# Altium PCB Handheld_REV1.PcbDoc (part 1 of 2)
Units mm, origin at the board's own origin, x right, y up, seen from the top; angles counter-clockwise.
Board outline 85 x 55 mm, 4 copper layers (Top Layer, Mid-Layer 1, Mid-Layer 2, Bottom Layer); 260 components, 237 nets, 1189 pads, 85 vias.
Unrouted connection lines stored in the file: 656.
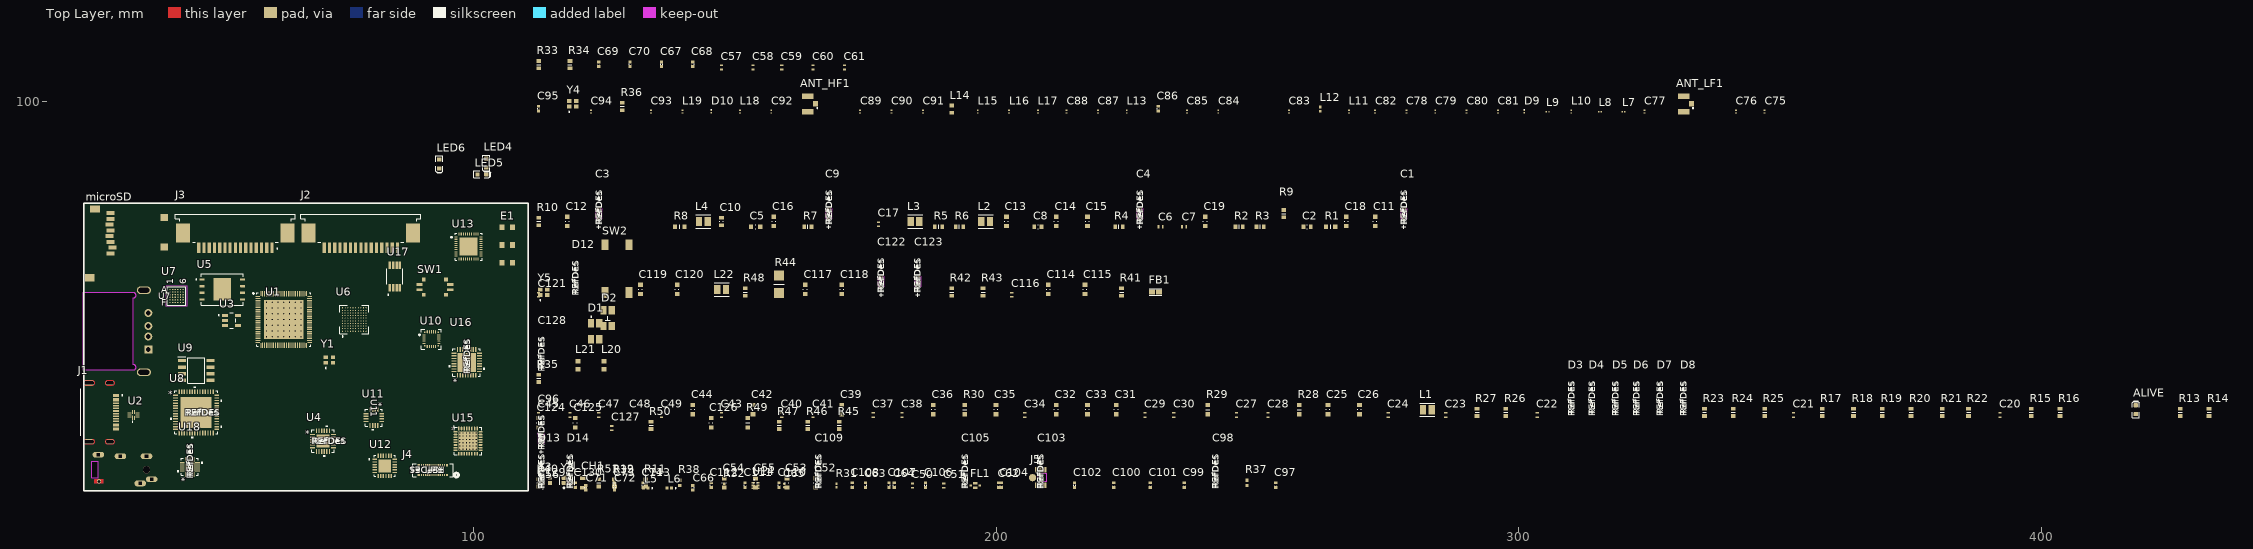
[diagram p0: Top Layer view]
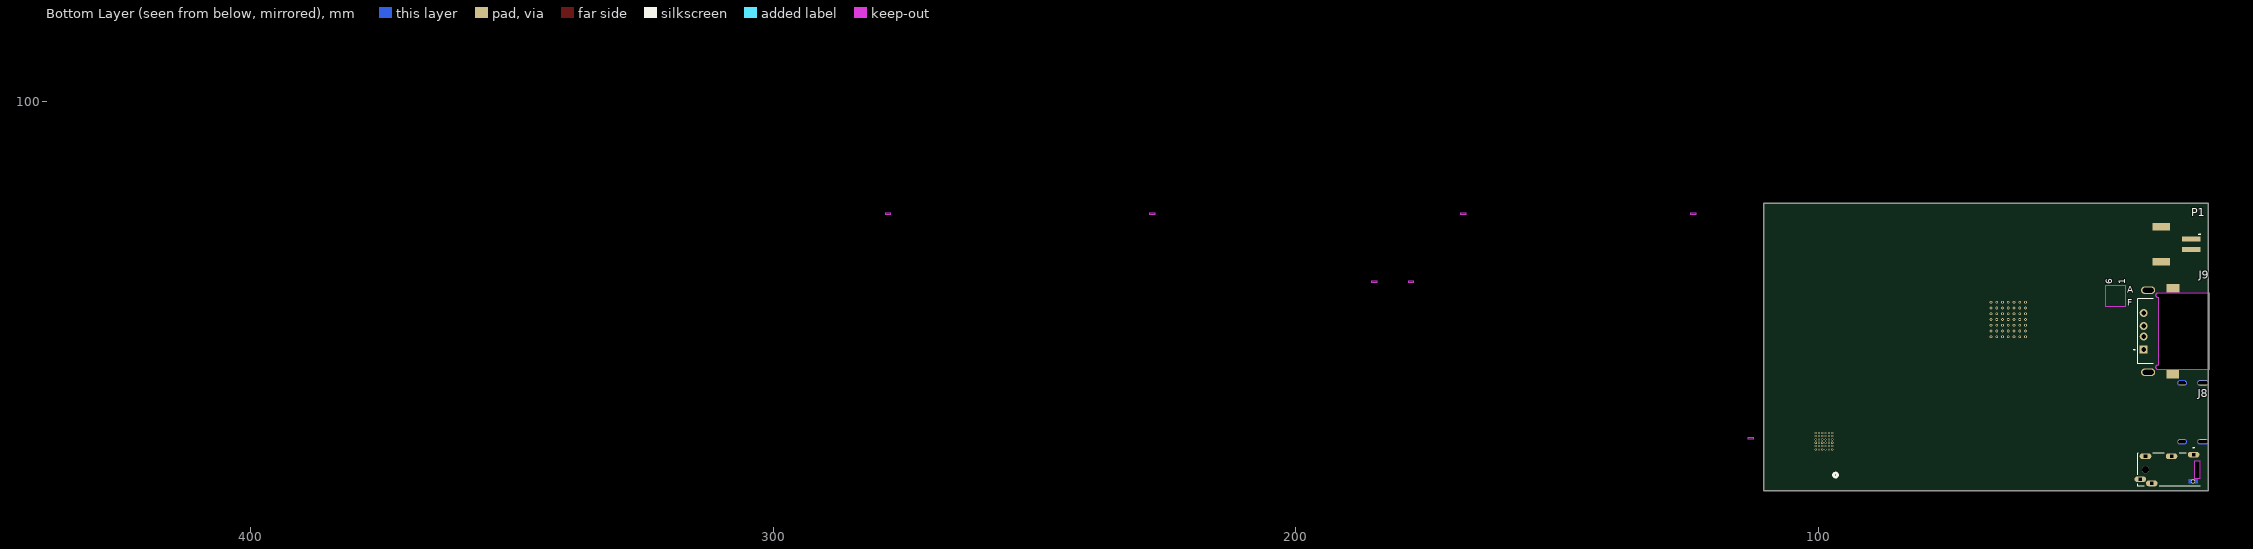
[diagram p1: Bottom Layer view, seen from below]
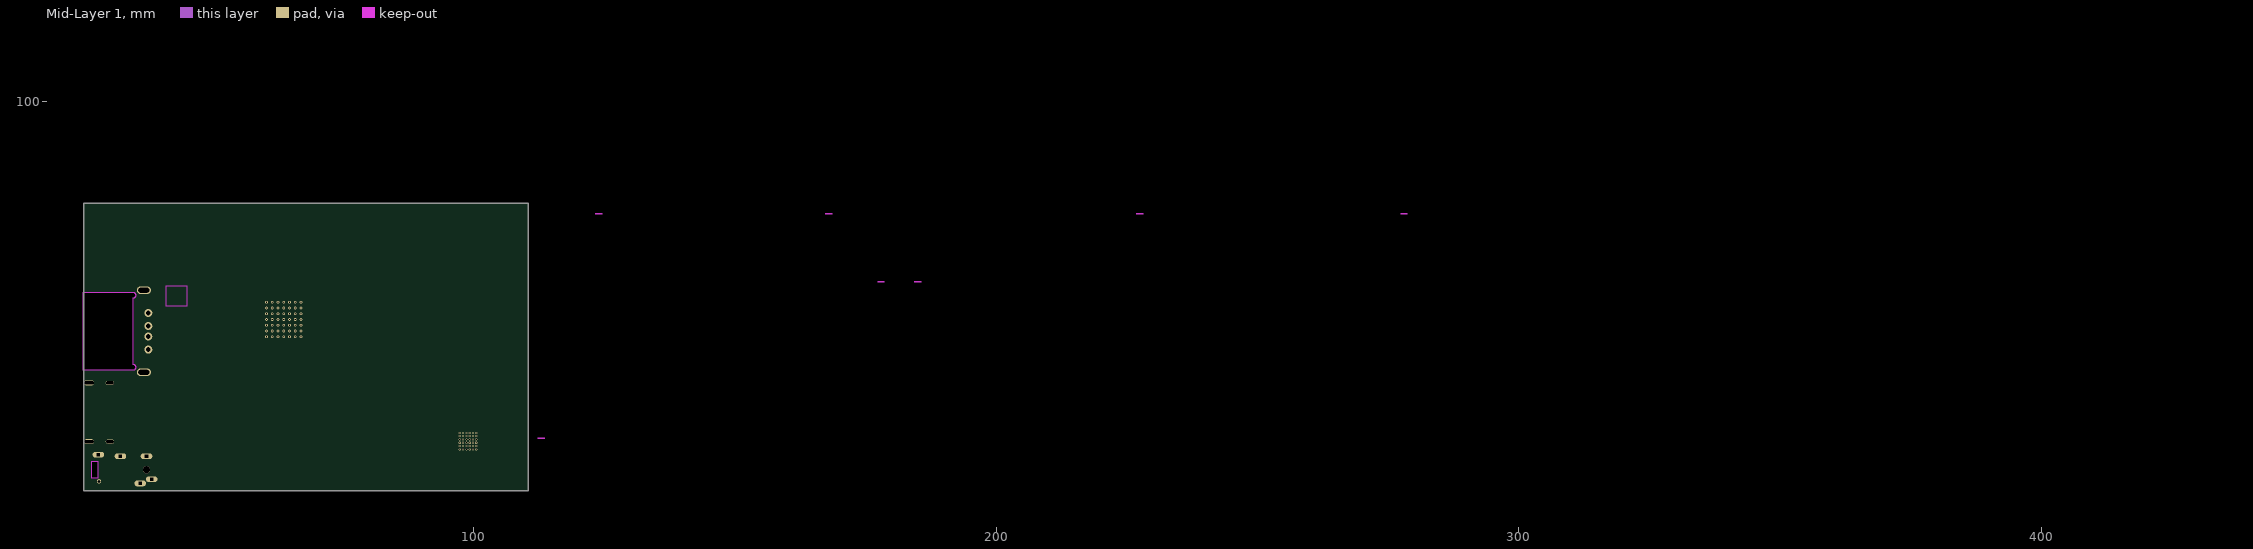
[diagram p2: Mid-Layer 1]
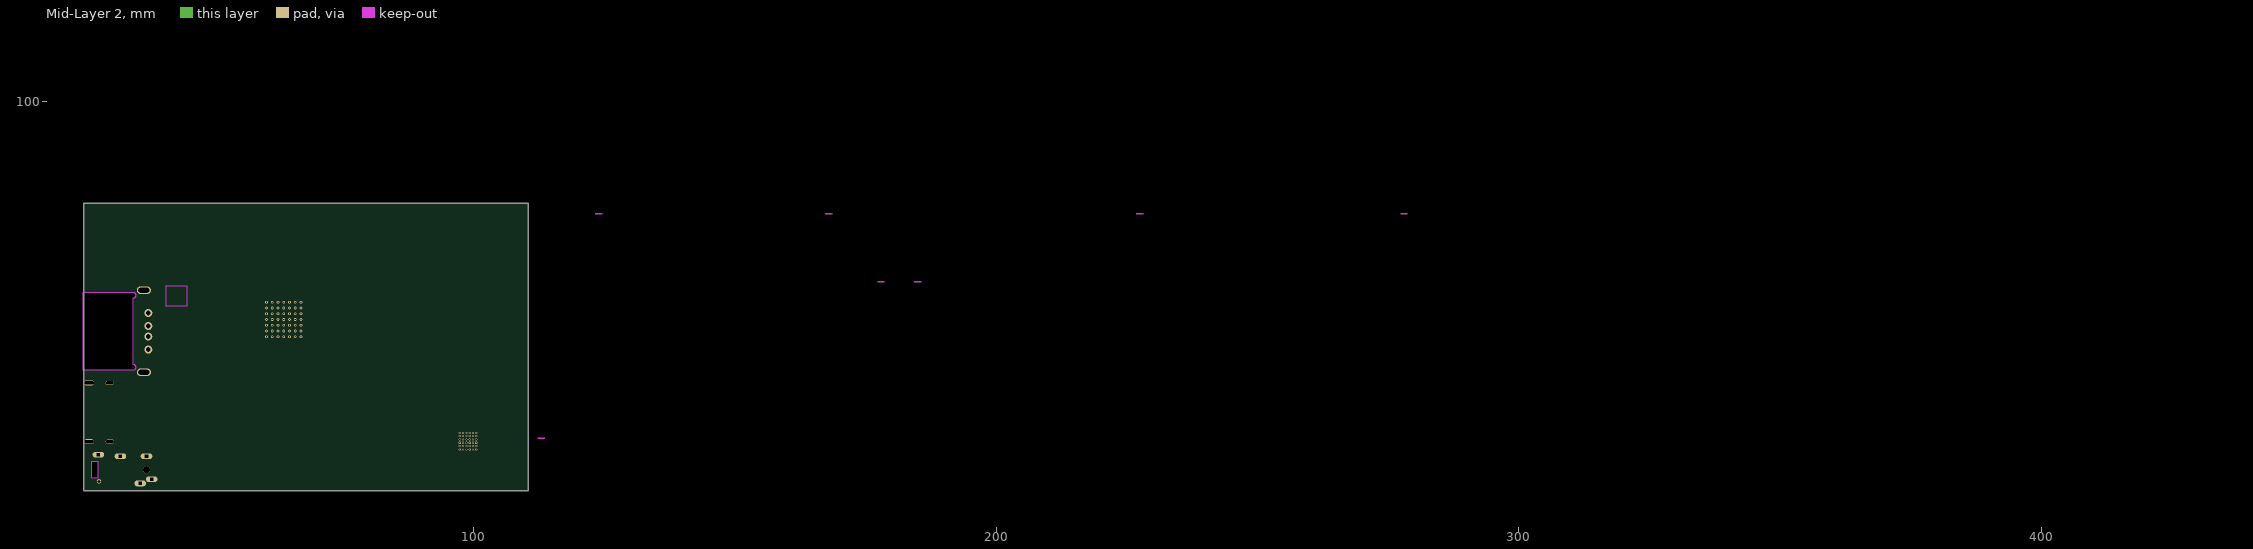
[diagram p3: Mid-Layer 2]

## Layer stack, top to bottom
Top Solder: solder mask 0.0102, Solder Resist, Dk 3.5
Top Layer: signal copper 0.0356
Dielectric 1: dielectric 0.32, FR-4, Dk 4.8
Mid-Layer 1: signal copper 0.0356
Dielectric2: dielectric 0.32, FR-4, Dk 4.8
Mid-Layer 2: signal copper 0.0356
Dielectric3: dielectric 0.32, FR-4, Dk 4.8
Bottom Layer: signal copper 0.0356
Bottom Solder: solder mask 0.0102, Solder Resist, Dk 3.5

## Board outline
25.5,25.5 25.5,80.5 110.5,80.5 110.5,25.5

## Design rules (kind name [scope] priority, off if disabled: settings)
Clearance [All] p1: gap=0.254 ignorepadtopadclearanceinfootprint=FALSE
PolygonConnect [All] p1: connectstyle=Relief reliefconductorwidth=0.254 reliefentries=4 polygonreliefangle="90 Angle" airgapwidth=0.254
RoomDefinition Main [InComponentClass('Main')] p1: confinementstyle=ConfineIn formatcopy=TRUE lockcomponents=FALSE outline 0,0 50.8,0 50.8,25.4 0,25.4
RoutingVias [All] p1: holewidth=0.711 width=1.27 viastyle="Through Hole" minholewidth=0.711 minwidth=1.27 maxholewidth=0.711 maxwidth=1.27
SolderMaskExpansion [All] p1: expansion=0.102 istentingtop=FALSE
SupplyNets "Schematic Supply Nets_14" [InNet('5V')] p1: voltage=0.000
SupplyNets "Schematic Supply Nets_13" [InNet('VR_PA')] p2: voltage=0.000
SupplyNets "Schematic Supply Nets_12" [InNet('GND')] p3: voltage=0.000
SupplyNets "Schematic Supply Nets_11" [InNet('1V8_FTDI')] p4: voltage=0.000
SupplyNets "Schematic Supply Nets_10" [InNet('VDD_FLASH')] p5: voltage=0.000
SupplyNets "Schematic Supply Nets_9" [InNet('VBUS')] p6: voltage=0.000
SupplyNets "Schematic Supply Nets_8" [InNet('0V9')] p7: voltage=0.000
SupplyNets "Schematic Supply Nets_7" [InNet('MIPI_2V5')] p8: voltage=0.000
SupplyNets "Schematic Supply Nets_6" [InNet('VBAT')] p9: voltage=0.000
SupplyNets "Schematic Supply Nets_5" [InNet('HP_CORE_1V1')] p10: voltage=0.000
SupplyNets "Schematic Supply Nets_4" [InNet('VDD_PSRAM')] p11: voltage=0.000
SupplyNets "Schematic Supply Nets_3" [InNet('1V8')] p12: voltage=0.000
SupplyNets "Schematic Supply Nets_2" [InNet('3V3')] p13: voltage=0.000
SupplyNets "Schematic Supply Nets_1" [InNet('VDD4_1V8')] p14: voltage=0.000
SupplyNets "Schematic Supply Nets" [InNet('VSYS')] p15: voltage=0.000
Width [All] p1: maxlimit=0.254 minlimit=0.254 preferedwidth=0.254
30 further rules are at their usual default settings.

## Classes and differential pairs
component class Main: C17 R9 SW1 U2
component class WiFi: C57 C58 C59 C60 C61 C64 C65 C66 C67 C68 C69 C70 C71 C72 C73 C74 C129 C130 E1 FL1 J5 L5 L6 R31 R32 R33 R34 R35 U13 U14 Y2 Y3
component class "Sub GHz and LoRa": ANT_HF1 ANT_LF1 C75 C76 C77 C78 C79 C80 C81 C82 C83 C84 C85 C86 C87 C88 C89 C90 C91 C92 C93 C94 C95 D9 D10 L7 L8 L9 L10 L11 L12 L13 L14 L15 L16 L17 L18 L19 R36 U15 Y4
component class NFC: AE1 C97 C98 C99 C100 C101 C102 C103 C104 C105 C106 C107 C108 C109 C110 C111 C112 C113 C128 D11 J7 L20 L21 N_CH1 Q1 R37 R38 R39 R40 U16 Y5
component class MMI: J4 J8 U11 U12 U18
component class Power: C1 C2 C3 C4 C5 C6 C7 C8 C9 C10 C11 C12 C13 C14 C15 C16 C18 C19 C96 C114 C115 C116 C117 C118 C119 C120 C121 C122 C123 D12 FB1 J1 L2 L3 L4 L22 LED4 P1 R1 R2 R3 R4 R5 R6 R7 R8 R10 R41 R42 R43 R44 R48 SW2 U4 U7
component class DebugUSB: C50 C51 C52 C53 C54 C55 C56 LED5 LED6 R11 R12 U8 U9
component class Microcontroller: ALIVE C20 C21 C22 C23 C24 C25 C26 C27 C28 C29 C30 C31 C32 C33 C34 C35 C36 C37 C38 C39 C40 C41 C42 C43 C44 C45 C46 C47 C48 C49 C62 C63 C124 C125 C126 C127 D1 D3 D4 D5 D6 D7 D8 D13 D14 J2 J3 J9 L1 microSD R13 R14 R15 R16 R17 R18 R19 R20 R21 R22 R23 R24 R25 R26 R27 R28 R29 R30 R45 R46 R47 R49 R50 R51 U1 U3 U5 U17 Y1
component class FPGA: D2 U6
component class "Sub GHz, WiFi, BLE": U10

## Components (designator, comment, footprint, x,y, rotation, side; value= is the part's Value field where it differs from the comment)
ALIVE "SMD LED 0603, Green" LED-0603-RED 417.999,41 r90 top
ANT_HF1 "U.FL" "U.FL-R-SMT Hirose_2337019-1" 164,99.5 r90 top
ANT_LF1 "U.FL" "U.FL-R-SMT Hirose_2337019-1" 331.499,99.5 r90 top
C1 "T529P476M006AAE150" CAPMP2.1X1.25_1N_KEM 277.999,78.5 r90 top
C2 "22pF, 10V" "0603 Capacitor"#1 259.499,76 r0 top
C3 "T529P476M006AAE150" CAPMP2.1X1.25_1N_KEM 124,78.5 r90 top
C4 "T529P476M006AAE150" CAPMP2.1X1.25_1N_KEM 227.5,78.5 r90 top
C5 "10uF, 16V" "0603 Capacitor"#2 154,76 r0 top value=10uF
C6 "100nF 16V 10%" 0402 231.5,76 r0 top
C7 "1" 0402 236,76 r0 top
C8 "22pF, 10V" "0603 Capacitor"#1 208,76 r0 top
C9 "T529P476M006AAE150" CAPMP2.1X1.25_1N_KEM 168,78.5 r90 top
C10 "22pF, 10V" "0603 Capacitor"#1 147.5,77 r90 top
C11 "10uF, 16V" "0603 Capacitor"#2 272.499,77 r90 top value=10uF
C12 "10uF, 16V" "0603 Capacitor"#2 118,77 r90 top value=10uF
C13 "10uF, 16V" "0603 Capacitor"#2 202,77 r90 top value=10uF
C14 "10uF, 16V" "0603 Capacitor"#2 211.5,77 r90 top value=10uF
C15 "10uF, 16V" "0603 Capacitor"#2 217.5,77 r90 top value=10uF
C16 "10uF, 16V" "0603 Capacitor"#2 157.5,77 r90 top value=10uF
C17 "100nF 16V" 0402 177.5,76.5 r90 top
C18 "10uF, 16V" "0603 Capacitor"#2 266.999,77 r90 top value=10uF
C19 "10uF, 16V" "0603 Capacitor"#2 240,77 r90 top value=10uF
C20 "100nF 16V" 0402 391.999,40 r90 top
C21 "100nF 16V" 0402 352.499,40 r90 top
C22 "100nF 16V" 0402 303.499,40 r90 top
C23 "100nF 16V" 0402 285.999,40 r90 top
C24 "100nF 16V" 0402 274.999,40 r90 top
C25 "10uF, 16V" "0603 Capacitor"#2 263.499,41 r90 top value=10uF
C26 "10uF, 16V" "0603 Capacitor"#2 269.499,41 r90 top value=10uF
C27 "100nF 16V" 0402 246,40 r90 top
C28 "100nF 16V" 0402 251.999,40 r90 top
C29 "100nF 16V" 0402 228.5,40 r90 top
C30 "100nF 16V" 0402 234,40 r90 top
C31 "10uF, 16V" "0603 Capacitor"#2 223,41 r90 top value=10uF
C32 "10uF, 16V" "0603 Capacitor"#2 211.5,41 r90 top value=10uF
C33 "10uF, 16V" "0603 Capacitor"#2 217.5,41 r90 top value=10uF
C34 "100nF 16V" 0402 205.5,40 r90 top
C35 "10uF, 16V" "0603 Capacitor"#2 200,41 r90 top value=10uF
C36 "10uF, 16V" "0603 Capacitor"#2 188,41 r90 top value=10uF
C37 "100nF 16V" 0402 176.5,40 r90 top
C38 "100nF 16V" 0402 182,40 r90 top
C39 "10uF, 16V" "0603 Capacitor"#2 170.5,41 r90 top value=10uF
C40 "100nF 16V" 0402 159,40 r90 top
C41 "100nF 16V" 0402 165,40 r90 top
C42 "10uF, 16V" "0603 Capacitor"#2 153.5,41 r90 top value=10uF
C43 "100nF 16V" 0402 147.5,40 r90 top
C44 "10uF, 16V" "0603 Capacitor"#2 142,41 r90 top value=10uF
C45 "100nF 16V" 0402 112.5,40 r90 top
C46 "100nF 16V" 0402 118.5,40 r90 top
C47 "100nF 16V" 0402 124,40 r90 top
C48 "100nF 16V" 0402 130,40 r90 top
C49 "100nF 16V" 0402 136,40 r90 top
C50 "100nF 16V" 0402 184,26.5 r90 top
C51 "100nF 16V" 0402 190,26.5 r90 top
C52 "10uF, 16V" "0603 Capacitor"#2 165.5,27 r90 top value=10uF
C53 "10uF, 16V" "0603 Capacitor"#2 160,27 r90 top value=10uF
C54 "10uF, 16V" "0603 Capacitor"#2 148,27 r90 top value=10uF
C55 "10uF, 16V" "0603 Capacitor"#2 154,27 r90 top value=10uF
C56 "100nF 16V" 0402 112.5,26.5 r90 top
C57 "100nF 16V" 0402 147.5,106.5 r90 top
C58 "100nF 16V" 0402 153.5,106.5 r90 top
C59 "100nF 16V" 0402 159,106.5 r90 top
C60 "100nF 16V" 0402 165,106.5 r90 top
C61 "100nF 16V" 0402 171,106.5 r90 top
C62 "6.8pF, 50V" "0402 resistor" 200.5,26.5 r90 top value=6.8pF
C63 "6.8pF, 50V" "0402 resistor" 175,26.5 r90 top value=6.8pF
C64 "10pF, 50V" "0402 resistor" 180.5,26.5 r90 top value=10pF
C65 "GJM0335C1E100JB01D" 0201 159.5,26.5 r90 top value=8.2pF
C66 "10pF, 50V" "0402 resistor" 142,26 r90 top value=10pF
C67 "2.2uF, 35V" "0402 resistor" 136,107 r90 top
C68 "2.2uF, 35V" "0402 resistor" 142,107 r90 top
C69 "2.2uF, 35V" "0402 resistor" 124,107 r90 top
C70 "2.2uF, 35V" "0402 resistor" 130,107 r90 top
C71 "10pF, 50V" "0402 resistor" 121.5,26 r90 top value=10pF
C72 "3.9pF, 50V" "0402 resistor" 127,26 r90 top
C73 "3.9pF, 50V" "0402 resistor" 127,26.5 r90 top
C74 "3.9pF, 50V" "0402 resistor" 132.5,26.5 r90 top
C75 "Cap" c_201_smd 346.999,98 r90 top value=VAL?
C76 "Cap" c_201_smd 341.499,98 r90 top value=VAL?
C77 "Cap" c_201_smd 323.999,98 r90 top value=VAL?
C78 "Cap" c_201_smd 278.499,98 r90 top value=VAL?
C79 "Cap" c_201_smd 283.999,98 r90 top value=VAL?
C80 "Cap" c_201_smd 289.999,98 r90 top value=VAL?
C81 "Cap" c_201_smd 295.999,98 r90 top value=VAL?
C82 "Cap" c_201_smd 272.499,98 r90 top value=VAL?
C83 "Cap" c_201_smd 255.999,98 r90 top value=VAL?
C84 "Cap" c_201_smd 242.5,98 r90 top value=VAL?
C85 "Cap" c_201_smd 236.5,98 r90 top value=VAL?
C86 "2.2uF, 35V" "0402 resistor" 231,98.5 r90 top
C87 "Cap" c_201_smd 219.5,98 r90 top value=VAL?
C88 "Cap" c_201_smd 213.5,98 r90 top value=VAL?
C89 "Cap" c_201_smd 174,98 r90 top value=VAL?
C90 "Cap" c_201_smd 180,98 r90 top value=VAL?
C91 "Cap" c_201_smd 186,98 r90 top value=VAL?
C92 "Cap" c_201_smd 157,98 r90 top value=VAL?
C93 "Cap" c_201_smd 134,98 r90 top value=?
C94 "Cap" c_201_smd 122.5,98 r90 top value=VAL?
C95 "2.2uF, 35V" "0402 resistor" 112.5,98.5 r90 top
C96 "T529P476M006AAE150" CAPMP2.1X1.25_1N_KEM 113,35.5 r90 top
C97 "33pF, 50V" "0402 resistor" 253.499,26.5 r90 top value=33pF
C98 "LXRW0YV600-054" LXRW0_MUR-M 242,28 r90 top
C99 "10pF, 50V" "0402 resistor" 236,26.5 r90 top value=10pF
C100 "100pF, 50V" "0402 resistor" 222.5,26.5 r90 top
C101 "10pF, 50V" "0402 resistor" 229.5,26.5 r90 top value=10pF
C102 "680pF, 50V" "0402 resistor" 215,26.5 r90 top value=680pF
C103 "LXRW0YV600-054" LXRW0_MUR-M 208.5,28 r90 top
C104 "100pF, 50V" "0402 resistor" 201,26.5 r90 top
C105 "LXRW0YV600-054" LXRW0_MUR-M 194,28 r90 top
C106 "10pF, 50V" "0402 resistor" 186.5,26.5 r90 top value=10pF
C107 "100pF, 50V" "0402 resistor" 179.5,26.5 r90 top
C108 "680pF, 50V" "0402 resistor" 172.5,26.5 r90 top value=680pF
C109 "LXRW0YV600-054" LXRW0_MUR-M 166,28 r90 top
C110 "100pF, 50V" "0402 resistor" 158.5,26.5 r90 top
C111 "10pF, 50V" "0402 resistor" 152,26.5 r90 top value=10pF
C112 "10pF, 50V" "0402 resistor" 145.5,26.5 r90 top value=10pF
C113 "33pF, 50V" "0402 resistor" 132.5,26.5 r90 top value=33pF
C114 "10uF, 16V" "0603 Capacitor"#2 210,64 r90 top value=10uF
C115 "10uF, 16V" "0603 Capacitor"#2 217,64 r90 top value=10uF
C116 "100nF 16V 10%" 0402 203,63 r90 top
C117 "10uF, 16V" "0603 Capacitor"#2 163.5,64 r90 top value=10uF
C118 "10uF, 16V" "0603 Capacitor"#2 170.5,64 r90 top value=10uF
C119 "10uF, 16V" "0603 Capacitor"#2 132,64 r90 top value=10uF
C120 "10uF, 16V" "0603 Capacitor"#2 139,64 r90 top value=10uF
C121 "100nF 16V 10%" 0402 112.5,63 r90 top
C122 "T529P476M006AAE150" CAPMP2.1X1.25_1N_KEM 178,65.5 r90 top
C123 "T529P476M006AAE150" CAPMP2.1X1.25_1N_KEM 185,65.5 r90 top
C124 "10uF, 16V" "0603 Capacitor"#2 112.5,38.5 r90 top value=10uF
C125 "10uF, 16V" "0603 Capacitor"#2 119.5,38.5 r90 top value=10uF
C126 "10uF, 16V" "0603 Capacitor"#2 145.5,38.5 r90 top value=10uF
C127 "100nF 16V" 0402 126.5,37.5 r90 top
C128 "LXRW0YV600-054" LXRW0_MUR-M 113,50.5 r90 top
C129 "6.8pF, 50V" "0402 resistor" 112.5,26.5 r90 top value=6.8pF
C130 "6.8pF, 50V" "0402 resistor" 119.5,26.5 r90 top value=6.8pF
D1 "150120M173000" WL-SFCW_1206 123.3,56 r270 top
D2 "150120M173000" 150120M173000-Footprint-1 125.7,58.5 r270 top
D3 "DESD3V3E1BL-7B" CR_X1-DFN1006-2_DIO-M 309.999,42 r90 top
D4 "DESD3V3E1BL-7B" CR_X1-DFN1006-2_DIO-M 313.999,42 r90 top
D5 "DESD3V3E1BL-7B" CR_X1-DFN1006-2_DIO-M 318.499,42 r90 top
D6 "DESD3V3E1BL-7B" CR_X1-DFN1006-2_DIO-M 322.499,42 r90 top
D7 "DESD3V3E1BL-7B" CR_X1-DFN1006-2_DIO-M 326.999,42 r90 top
D8 "DESD3V3E1BL-7B" CR_X1-DFN1006-2_DIO-M 331.499,42 r90 top
D9 "TVS Diode" SLP0603P2X3F 300.999,98 r90 top
D10 "TVS Diode" SLP0603P2X3F 145.5,98 r90 top
D12 "DESD3V3E1BL-7B" CR_X1-DFN1006-2_DIO-M 119.5,65 r90 top
D13 "DESD3V3E1BL-7B" CR_X1-DFN1006-2_DIO-M 113,28 r90 top
D14 "DESD3V3E1BL-7B" CR_X1-DFN1006-2_DIO-M 118.5,28 r90 top
E1 "M830520" Ethertronics_M830520 106.5,72.5 r0 top
FB1 "BLM18SG260TN1D" FP-BLM18-0_15-t0_5-d3_3-IPC_B 230.5,63.5 r0 top
FL1 "DEA162450BT-1295A1" FP-DEA162450BT-1295A1_SMT_FILTER_1MM60_0MM80-MFG 196,26.5 r0 top
J1 "USB4520-03-0-A_REVA" GCT_USB4520-03-0-A_REVA 26.5,40.5 r270 top
J2 "1-84952-5" TE_1-84952-5 78.5,72 r180 top
J3 "1-84952-5" TE_1-84952-5 54.5,72 r180 top
J4 "BM14B(0.8)-24DS-0.4V(53)" CONN24_BM14B_HIR 92.295,29.44 r180 top
J5 "U.FL-R-SMT-1" CONN_UFL-R-SMT-1 208.5,28 r0 top
J8 "3.5mm" TENSILITY_54-00176 33,29.5 r90 bottom
J9 "USB1015-XX-X-X_REVC1" GCT_USB1015-XX-X-X_REVC1 37,56 r90 bottom
L1 "LQM2MPN2R2NG0L" FP-LQM2MPN_G0-IPC_B 282.499,41 r0 top value=138mΩ
L2 "0.47uH 0806" FP-LQM2MPN_G0-IPC_B 198,77 r0 top
L3 "4.7μH 1.1A 0806" FP-LQM2MPN_G0-IPC_B 184.5,77 r0 top
L4 "2.2uH 1.2A, 0806" FP-LQM2MPN_G0-IPC_B 144,77 r0 top
L5 "3.9nH, 0402" INDC1005X55N 133,26 r0 top
L6 "3.9nH, 0402" INDC1005X55N 137.5,26 r0 top
L7 "Inductor symbol" LQW_201_smd 319.999,98 r0 top value=VAL?
L8 "Inductor symbol" LQW_201_smd 315.499,98 r0 top value=VAL?
L9 "Inductor symbol" LQW_201_smd 305.499,98 r0 top value=VAL?
L10 "Inductor symbol" LQW_201_smd 309.999,98 r90 top value=VAL?
L11 "Inductor symbol" LQW_201_smd 267.499,98 r90 top value=VAL?
L12 "Inductor symbol" lqw_402_smd 261.999,98.5 r90 top value=VAL?
L13 "Inductor symbol" LQW_201_smd 225,98 r90 top value=VAL?
L14 "Inductor symbol" LQM18P_603_INDUCTOR_SMD 191.5,98.5 r90 top value=?
L15 "Inductor symbol" LQW_201_smd 196.5,98 r90 top value=VAL?
L16 "Inductor symbol" LQW_201_smd 202.5,98 r90 top value=VAL?
L17 "Inductor symbol" LQW_201_smd 208,98 r90 top value=VAL?
L18 "Inductor symbol" LQW_201_smd 151,98 r90 top value=VAL?
L19 "Inductor symbol" LQW_201_smd 140,98 r90 top value=VAL?
L20 "270nH 0603" INDC1608X95N 125,49.5 r90 top
L21 "270nH 0603" INDC1608X95N 120,49.5 r90 top
L22 "4.7μH 1.1A 0806" FP-LQM2MPN_G0-IPC_B 147.5,64 r0 top
LED4 "0603LED-Green" LED-0603-RED 102.5,88.15 r270 top
LED5 "0603LED-Green" LED-0603-RED 101.65,86 r0 top
LED6 "0603LED-Yellow" LED-0603-RED 93.5,88 r270 top
microSD "microSD" microSD 30.6,70.9 r90 top
N_CH1 "RQ5E070BNTCL" RTR040N03HZGTL-Footprint-1 119.5,27 r90 top
P1 "S2B-PH-SM4-TB" JST_S2B-PH-SM4-TB 28.75,72.65 r90 bottom
R1 "220K" "0603 Resistor"#1 263.999,76 r0 top
R2 "47K" "0603 Resistor"#2 246.5,76 r0 top
R3 "1K2" "0603 Resistor"#2 250.499,76 r0 top
R4 "100K" "0603 Resistor"#2 223.5,76 r0 top
R5 "47K" "0603 Resistor"#2 189,76 r0 top
R6 "3K3" "0603 Resistor"#2 193,76 r0 top
R7 "120K" "0603 Resistor"#2 164,76 r0 top
R8 "220K" "0603 Resistor"#1 139.5,76 r0 top
R9 "47K" "0603 Resistor"#2 254.999,78.5 r90 top
R10 "1K2" "0603 Resistor"#2 112.5,77 r90 top
R11 "33R" "0603 Resistor"#2 133,27 r90 top
R12 "33R" "0603 Resistor"#2 127,27 r90 top
R13 "33R" "0603 Resistor"#2 426.499,40.5 r90 top
R14 "1K2" "0603 Resistor"#2 431.999,40.5 r90 top
R15 "3K3" "0603 Resistor"#2 397.999,40.5 r90 top
R16 "3K3" "0603 Resistor"#2 403.499,40.5 r90 top
R17 "47K" "0603 Resistor"#2 357.999,40.5 r90 top
R18 "47K" "0603 Resistor"#2 363.999,40.5 r90 top
R19 "47K" "0603 Resistor"#2 369.499,40.5 r90 top
R20 "47K" "0603 Resistor"#2 374.999,40.5 r90 top
R21 "47K" "0603 Resistor"#2 380.999,40.5 r90 top
R22 "47K" "0603 Resistor"#2 385.999,40.5 r90 top
R23 "1K2" "0603 Resistor"#2 335.499,40.5 r90 top
R24 "1K2" "0603 Resistor"#2 340.999,40.5 r90 top
R25 "1K2" "0603 Resistor"#2 346.999,40.5 r90 top
R26 "33R" "0603 Resistor"#2 297.499,40.5 r90 top
R27 "33R" "0603 Resistor"#2 291.999,40.5 r90 top
R28 "0603 strap" "0603 pads" 257.999,41 r90 top
R29 "0603 strap" "0603 pads" 240.5,41 r90 top
R30 "4K02" "0603 Resistor"#1 194,41 r90 top
R31 "CRCW02010000Z0ED" 0201 169.5,26.5 r90 top value=0
R32 "CRCW02010000Z0ED" 0201 148,26.5 r90 top value=0
R33 "47K" "0603 Resistor"#2 112.5,107 r90 top
R34 "47K" "0603 Resistor"#2 118.5,107 r90 top
R35 "33R" "0603 Resistor"#2 112.5,47 r90 top
R36 "33R" "0603 Resistor"#2 128.5,99 r90 top
R37 "1R5" RESC1005X40X25ML05T05 248,27 r90 top
R38 "1R5" RESC1005X40X25ML05T05 139.5,27 r90 top
R39 "100R" RESC1005X40X25ML05T05 127,27 r90 top
R40 "47K" "0603 Resistor"#2 112.5,27 r90 top
R41 "1K2" "0603 Resistor"#2 224,63.5 r90 top
R42 "33R" "0603 Resistor"#2 191.5,63.5 r90 top
R43 "33R" "0603 Resistor"#2 197.5,63.5 r90 top
R44 "0R022" "1206 Resistor Package" 158.5,65 r90 top
R45 "33R" "0603 Resistor"#2 170,38 r90 top
R46 "33R" "0603 Resistor"#2 164,38 r90 top
R47 "33R" "0603 Resistor"#2 158.5,38 r90 top
R48 "47K" "0603 Resistor"#2 152,63.5 r90 top
R49 "4K02" "0603 Resistor"#1 152.5,38.5 r90 top
R50 "47K" "0603 Resistor"#2 134,38 r90 top
R51 "33R" "0603 Resistor"#2 124,27 r90 top
SW1 "CVS-02TB" CVS-02TB-Footprint-1 89.7,63.95 r90 top
SW2 "Tactile Switch" "TE connectivity part no. 2-1437565-8" 127.5,68 r0 top
U1 "ESP32-P4NRW32" QFN35P1000X1000X85_HS-105M 63.75,58.25 r0 top
U2 "PI3USB42ZMEX" QFN40P140X180X60-10N 35,40 r90 top
U3 "TLV62569DBVR" SOT95P280X145-5N 53.755,58.05 r0 top
U4 "LTC3521EUF#PBF" QFN-24_UF_LIT-M 71.25,35 r0 top
U5 "W25Q512JVEIQ" SON127P600X800X80-9N 52,64 r0 top
U6 "TI60F100S3F2C3" IC_TI60F100S3F2C3 77.25,58.25 r90 top
U7 "MAX77972EWX+" 21-100517_W363B3+1_ADI 43.25,62.75 r0 top
U8 "FT4232" VQFN-56Y856_FTD-M 47,40.5 r0 top
U9 "CMP-001-O78.0.1" M24C04-DRMN3TP_K-Footprint-1 47,48.5 r0 top
U10 "TPS22993RLWR" FP-RLW0020A-MFG 92,54.5 r0 top
U11 "AD5593RBCPZ-RL7" CP_16_32_ADI-M 81,39.5 r270 top
U12 "TCA8418RTWR" QFN50P400X400X80-25N 83.065,30.25 r0 top
U13 "CC3351ENJARSBR" RSB0040B-MFG 99.1,72.2 r0 top
U14 "CMP-0002040-1" TDK_DPX165950DT-8148A1 154,26.5 r0 top
U15 "LR2021" qfn32l_5x5mm 99,35 r0 top
U16 "ST25R3916B-AQWT" VFQFPN32_5X5_WETTABLE_STM-M 98.75,50.049 r90 top
U17 "TCA9617BDGKR" SOP65P490X110-8N 85,66.5 r90 top
U18 "SGTL5000XNLA3" HUQFN20_SOT1628-1_NXP-M 45.8,30.052 r90 top
Y1 "40MHz CXO" XTAL_ECS-400-10-37B2-CKM-TR 72.5,50.5 r0 top
Y2 "LFSPXO073707REEL" FP-LFSPXO073707REEL_SMT4_2MM0_1MM6-MFG 118,27.5 r0 top
Y3 "ECS-400-10-37B2-CKM-TR" XTAL_ECS-400-10-37B2-CKM-TR 114,27.5 r0 top
Y4 "TCXO 32MHz" XTAL_ECS-400-10-37B2-CKM-TR 119,99.5 r0 top
Y5 "27.12MHz" XTAL_ECS-400-10-37B2-CKM-TR 113.5,63.5 r0 top

## Footprints (in the part's own frame and the unit in brackets; to place one, negate y for a bottom-side part, rotate by r counter-clockwise, add the part's x,y. Pads: shape width x height; smd on the part's side, far side on the other; paste and mask are expansions set on the pad)
21-100517_W363B3+1_ADI [mm]
  round 0.254 smd paste+0 mask+0: A1(-1.25,1.25) A2(-0.75,1.25) A3(-0.25,1.25) A4(0.25,1.25) A5(0.75,1.25) A6(1.25,1.25) B1(-1.25,0.75) B2(-0.75,0.75) B3(-0.25,0.75) B4(0.25,0.75) B5(0.75,0.75) B6(1.25,0.75) C1(-1.25,0.25) C2(-0.75,0.25) C3(-0.25,0.25) C4(0.25,0.25) C5(0.75,0.25) C6(1.25,0.25) D1(-1.25,-0.25) D2(-0.75,-0.25) D3(-0.25,-0.25) D4(0.25,-0.25) D5(0.75,-0.25) D6(1.25,-0.25) E1(-1.25,-0.75) E2(-0.75,-0.75) E3(-0.25,-0.75) E4(0.25,-0.75) E5(0.75,-0.75) E6(1.25,-0.75) F1(-1.25,-1.25) F2(-0.75,-1.25) F3(-0.25,-1.25) F4(0.25,-1.25) F5(0.75,-1.25) F6(1.25,-1.25)
  Keep-Out Layer region: -1.944,-1.944 -1.944,1.944 1.944,1.944 1.944,-1.944
  silkscreen extent -1.77,-1.74 1.77,1.74, body extent -1.64,-1.61 1.64,1.61, height 0.69
0201 [mm]
  rrect50% 0.46x0.42 smd mask+0.048: 1(-0.33,0) 2(0.33,0)
  body extent -0.31,-0.16 0.31,0.16, height 0.26
0402 [mil]
  rect 12x24 smd: 1(-17,0) 2(15,0)
"0402 resistor" [mil] "0402 resistor"
  rect 20x24.41 smd: 1(-14.65,0) 2(20,0)
  silkscreen extent 2,-9 4,9, body extent -18,-11 23,11, height 9
"0603 Capacitor"#1 [mm] "Chip Capacitor, Body 1.6x0.8mm, Height 0.55mm, IPC High Density"
  rect 0.7x0.9 smd: 1(-0.7,0) 2(0.7,0)
  silkscreen extent -0.05,-0.35 0.05,0.35, body extent -0.8,-0.4 0.8,0.4, height 0.6
"0603 Capacitor"#2 [mm] "Chip Capacitor, Body 1.6x0.8mm, Height 0.55mm, IPC High Density"
  rect 0.8x0.9 smd: 1(-0.889,0) 2(0.889,0)
  silkscreen extent -0.05,-0.35 0.05,0.35, body extent -0.8,-0.4 0.8,0.4, height 0.6
"0603 pads" [mm] "For straps, measure points or \"buttons\""
  rect 0.8x0.9 smd: 1(-0.889,0) 2(0.889,0)
  silkscreen extent 0,-0.38 0,0.38
"0603 Resistor"#1 [mm] "Chip Resistor, Body 1.6x0.8mm, IPC High Density"
  rect 0.8x0.9 smd: 1(-0.889,0) 2(0.889,0)
  silkscreen extent 0,-0.38 0,0.38, body extent -0.8,-0.4 0.8,0.4, height 0.41
"0603 Resistor"#2 [mm] "Chip Resistor, Body 1.6x0.8mm, IPC High Density"
  rect 0.7x0.9 smd: 1(-0.7,0) 2(0.7,0)
  silkscreen extent 0,-0.38 0,0.38, body extent -0.8,-0.4 0.8,0.4, height 0.41
"1206 Resistor Package" [mm]
  rect 1.9x1.9 smd: 1(-1.65,0) 2(1.65,0)
  silkscreen extent 0,-1.02 0,1, body extent -1.55,-0.8 1.65,0.8, height 1.01
150120M173000-Footprint-1 [mm]
  rect 1.6x1.2 smd: 1(-1.5,0.8) 2(-1.5,-0.8) 3(1.5,-0.8) 4(1.5,0.8)
  silkscreen extent -0.4,-0.5 0.4,0.5, body extent -1.6,-0.8 1.6,0.8, height 0.74
c_201_smd [mm] "Chip SMD component 201; Body 0.6 x 0.3 mm (LxW typ); small footprint"
  rect 0.25x0.35 smd paste+0 mask+0.025: 1(-0.25,0) 2(0.25,0)
  body extent -0.3,-0.15 0.3,0.15, height 0.3
CAPMP2.1X1.25_1N_KEM [mm]
  rect 1.055x1 smd paste+0 mask+0: 1(-0.675,0) 2(0.675,0)
  Top Layer keep-out region: -0.999,-0.574 -0.999,-0.551 0.999,-0.551 0.999,-0.574
  Top Layer keep-out region: -0.999,0.551 -0.999,0.574 0.999,0.574 0.999,0.551
  Top Layer keep-out region: -0.096,-0.551 -0.096,0.551 0.096,0.551 0.096,-0.551
  Keep-Out Layer region: -0.096,-0.551 -0.096,0.551 0.096,0.551 0.096,-0.551
  silkscreen extent -2.9,-0.38 -2.14,0.38, body extent -1.05,-0.63 1.05,0.63, height 1.05
CONN24_BM14B_HIR [mil]
  rect 17x16 smd paste-8.5 mask-8.5: 1(-106.5,37.01) 14(106.5,37.01) 15(106.5,-37.01) 28(-106.49,-37.01)
  rect 9x16 smd paste+0 mask+0: 2(-86.62,37.01) 3(-70.88,37.01) 4(-55.13,37.01) 5(-39.38,37.01) 6(-23.63,37.01) 7(-7.88,37.01) 8(7.87,37.01) 9(23.62,37.01) 10(39.37,37.01) 11(55.12,37.01) 12(70.88,37.01) 13(86.62,37.01) 16(86.62,-37.01) 17(70.88,-37.01) 18(55.13,-37.01) 19(39.38,-37.01) 20(23.63,-37.01) 21(7.88,-37.01) 22(-7.87,-37.01) 23(-23.62,-37.01) 24(-39.37,-37.01) 25(-55.12,-37.01) 26(-70.88,-37.01) 27(-86.62,-37.01)
  silkscreen extent -192,-48 152,52, body extent -144,-39 143,38, height 31
CONN_UFL-R-SMT-1 [mm]
  round 1.4 smd paste-0.1 mask-0.1: 1(-1.525,0)
  rect 2.2x1.05 smd paste-2 mask-2: 2(0,1.475) 3(0,-1.475)
  rect 2x0.9 on Top Paste: 2(0,1.5) 3(0,-1.5)
  rect 2x0.9 on Top Solder: 2(0,1.5) 3(0,-1.5)
  Top Layer keep-out region: -0.671,-0.698 1.229,-0.698 1.229,0.702 -0.671,0.702
  body extent -1.55,-1.5 1.55,1.5, height 1.27
CP_16_32_ADI-M [mm]
  rect 0.906x0.249 smd paste+0 mask+0: 1(-1.503,0.75) 2(-1.503,0.25) 3(-1.503,-0.25) 4(-1.503,-0.75) 9(1.503,-0.75) 10(1.503,-0.25) 11(1.503,0.25) 12(1.503,0.75)
  rect 0.249x0.906 smd paste+0 mask+0: 5(-0.75,-1.503) 6(-0.25,-1.503) 7(0.25,-1.503) 8(0.75,-1.503) 13(0.75,1.503) 14(0.25,1.503) 15(-0.25,1.503) 16(-0.75,1.503)
  silkscreen extent -1.63,-1.63 2.46,1.63, body extent -1.55,-1.55 1.55,1.55, height 0.8
CR_X1-DFN1006-2_DIO-M [mil]
  rect 16x22 smd paste+0 mask-1: 1(-11.5,0) 2(11.5,0)
  silkscreen extent -68,-3 -62,3, body extent -21,-12 21,12, height 21
CVS-02TB-Footprint-1 [mm]
  rect 0.7x0.7 smd: 0(-0.95,-0.8) 0(-0.95,-5.1) 0(1.95,-0.8) 0(1.95,-5.1)
  rect 0.5x1.2 smd: 1(0,0) 2(1,0) 3(1,-5.9) 4(0,-5.9)
  body extent -1,-5.95 2,0.15, height 1.37
Ethertronics_M830520 [mm]
  rect 0.9x1.1 smd: 1(-1,3.4) 2(-1,0) 3(-1,-3.4) 4(1,-3.4) 5(1,0) 6(1,3.4)
  body extent -1.5,-4 1.5,4, height 1.33
FP-BLM18-0_15-t0_5-d3_3-IPC_B [mm]
  rect 1.106x0.958 smd paste+0 mask+0: 1(-0.676,0) 2(0.676,0)
  silkscreen extent -1.23,-0.63 1.23,0.63, body extent -1.48,-0.73 1.48,0.73, height 0.25
FP-DEA162450BT-1295A1_SMT_FILTER_1MM60_0MM80-MFG [mm]
  rrect33% 0.5x0.3 smd paste+0 mask+0: 1(-0.85,0) 3(0.85,0)
  rrect20% 0.8x0.5 smd paste+0 mask+0: 2(0,-0.45) 4(0,0.45)
  body extent -1.2,-0.8 1.2,0.8, height 0.25
FP-LFSPXO073707REEL_SMT4_2MM0_1MM6-MFG [mm]
  rrect13% 0.88x0.78 smd paste+0 mask+0: 1(-0.64,-0.49) 2(0.64,-0.49) 3(0.64,0.49) 4(-0.64,0.49)
  silkscreen extent -1.46,-1.57 1.46,0.88, body extent -1.18,-0.98 1.18,0.98, height 0.25
FP-LQM2MPN_G0-IPC_B [mm]
  rect 1.206x1.758 smd paste+0 mask+0: 1(-0.826,0) 2(0.826,0)
  silkscreen extent -1.43,-1.28 1.43,1.28, body extent -1.68,-1.13 1.68,1.13, height 0.25
FP-RLW0020A-MFG [mm]
  rrect100% 0.6x0.2 smd paste+0 mask+0: 1(-1.4,0.8) 2(-1.4,0.4) 3(-1.4,0) 4(-1.4,-0.4) 5(-1.4,-0.8) 11(1.4,-0.8) 12(1.4,-0.4) 13(1.4,0) 14(1.4,0.4) 15(1.4,0.8)
  rrect100% 0.2x0.6 smd paste+0 mask+0: 6(-0.8,-1.4) 7(-0.4,-1.4) 8(0,-1.4) 9(0.4,-1.4) 10(0.8,-1.4) 16(0.8,1.4) 17(0.4,1.4) 18(0,1.4) 19(-0.4,1.4) 20(-0.8,1.4)
  rect 0.25x0.25 smd paste+0 mask+0: 21(-1.288,1.288) 22(1.288,1.288) 23(-1.288,-1.288) 24(1.288,-1.288)
  silkscreen extent -2.4,-1.9 1.9,1.9, body extent -1.8,-1.8 1.8,1.8, height 0.25
GCT_USB1015-XX-X-X_REVC1 [mm]
  rect 1.524x1.524 / inner round 1.524 / far side rect 1.524x1.524 hole 0.92: 1(-3.5,0.85)
  round 1.524 hole 0.92: 2(-1,0.85) 3(1,0.85) 4(3.5,0.85)
  rect 1.6x2.4 smd: SH1(-8.2,-4.75)
  oval 1.5x2.7 hole 0.9 slot 2.1 at 90 deg: SH2(-7.85,0) SH3(7.85,0)
  rect 1.6x2.5 smd: SH4(8.2,-4.75)
  Keep-Out Layer board cut-out: 7.4,-11.65 -7.4,-11.65 -7.4,-1.95 -7.396,-1.921 -7.392,-1.897 -7.386,-1.873 -7.38,-1.85 -7.372,-1.826 -7.363,-1.803 -7.353,-1.781 -7.341,-1.759 -7.329,-1.738 -7.316,-1.717 -7.301,-1.697 -7.286,-1.678 -7.27,-1.659 -7.252,-1.642 -7.234,-1.625 -7.216,-1.609 -7.196,-1.594 -7.176,-1.58 -7.155,-1.567 -7.133,-1.556 -7.111,-1.545 -7.088,-1.535 -7.065,-1.527 -7.042,-1.519 -7.018,-1.513 -6.994,-1.508 -6.969,-1.504 -6.945,-1.502 -6.92,-1.5 -6.9,-1.5 -6.88,-1.5 -6.855,-1.502 -6.831,-1.504 -6.806,-1.508 -6.782,-1.513 -6.758,-1.519 -6.735,-1.527 -6.712,-1.535 -6.689,-1.545 -6.667,-1.556 -6.645,-1.567 -6.624,-1.58 -6.604,-1.594 -6.584,-1.609 -6.566,-1.625 -6.548,-1.642 -6.53,-1.659 -6.514,-1.678 -6.499,-1.697 -6.484,-1.717 -6.471,-1.738 -6.459,-1.759 -6.447,-1.781 -6.437,-1.803 -6.428,-1.826 -6.42,-1.85 -6.414,-1.873 -6.408,-1.897 -6.404,-1.921 -6.4,-1.95 -6.4,-2 6.4,-2 6.4,-1.95 6.403,-1.926 6.408,-1.901 6.413,-1.877 6.42,-1.853 6.428,-1.83 6.437,-1.807 6.447,-1.784 6.459,-1.762 6.471,-1.74 6.485,-1.719 6.499,-1.699 6.515,-1.68 6.531,-1.661 6.549,-1.643 6.567,-1.626 6.586,-1.61 6.606,-1.595 6.626,-1.581 6.648,-1.568 6.669,-1.556 6.692,-1.545 6.715,-1.535 6.738,-1.527 6.762,-1.519 6.786,-1.513 6.81,-1.508 6.835,-1.504 6.86,-1.502 6.884,-1.5 6.91,-1.5 6.934,-1.501 6.958,-1.502 6.982,-1.505 7.006,-1.51 7.03,-1.515 7.053,-1.522 7.077,-1.529 7.099,-1.538 7.121,-1.548 7.143,-1.559 7.164,-1.571 7.185,-1.584 7.205,-1.598 7.224,-1.613 7.242,-1.629 7.26,-1.646 7.276,-1.664 7.292,-1.683 7.307,-1.702 7.321,-1.722 7.334,-1.742 7.346,-1.764 7.356,-1.786 7.366,-1.808 7.375,-1.831 7.382,-1.854 7.388,-1.877 7.393,-1.901 7.397,-1.925 7.4,-1.95
  silkscreen extent -6.25,-0.97 6.25,2.71, body extent -8.55,-12.15 8.55,1.85, height 4.3
GCT_USB4520-03-0-A_REVA [mm]
  rect 0.6x1.1 smd: A1_B12(-3.2,5.15) A4_B9(-2.4,5.15) B1_A12(3.2,5.15) B4_A9(2.4,5.15)
  rect 0.3x1.1 smd: A5(-1.25,5.15) A6(-0.25,5.15) A7(0.25,5.15) A8(1.25,5.15) B5(1.75,5.15) B6(0.75,5.15) B7(-0.75,5.15) B8(-1.75,5.15)
  oval 0.95x1.9 hole 0.6 slot 1.8 at 90 deg mask+0: S1(-5.62,0) S4(5.62,0)
  oval 0.8x1.6 hole 0.6 slot 1.4 at 90 deg mask+0: S2(5.62,4) S3(-5.62,4)
  Top Layer region: -5.594,4.899 -5.568,4.897 -5.542,4.894 -5.516,4.889 -5.491,4.883 -5.465,4.876 -5.441,4.867 -5.417,4.857 -5.393,4.846 -5.37,4.833 -5.348,4.819 -5.326,4.805 -5.305,4.789 -5.285,4.772 -5.266,4.754 -5.248,4.735 -5.231,4.715 -5.215,4.694 -5.201,4.672 -5.187,4.65 -5.174,4.627 -5.163,4.603 -5.153,4.579 -5.144,4.555 -5.137,4.529 -5.131,4.504 -5.126,4.478 -5.123,4.452 -5.121,4.426 -5.12,4.4 -5.12,3.6 -5.121,3.574 -5.123,3.548 -5.126,3.522 -5.131,3.496 -5.137,3.471 -5.144,3.445 -5.153,3.421 -5.163,3.397 -5.174,3.373 -5.187,3.35 -5.201,3.328 -5.215,3.306 -5.231,3.285 -5.248,3.265 -5.266,3.246 -5.285,3.228 -5.305,3.211 -5.326,3.195 -5.348,3.181 -5.37,3.167 -5.393,3.154 -5.417,3.143 -5.441,3.133 -5.465,3.124 -5.491,3.117 -5.516,3.111 -5.542,3.106 -5.568,3.103 -5.594,3.101 -5.62,3.1 -5.646,3.101 -5.672,3.103 -5.698,3.106 -5.724,3.111 -5.749,3.117 -5.775,3.124 -5.799,3.133 -5.823,3.143 -5.847,3.154 -5.87,3.167 -5.892,3.181 -5.914,3.195 -5.935,3.211 -5.955,3.228 -5.974,3.246 -5.992,3.265 -6.009,3.285 -6.025,3.306 -6.039,3.328 -6.053,3.35 -6.066,3.373 -6.077,3.397 -6.087,3.421 -6.096,3.445 -6.103,3.471 -6.109,3.496 -6.114,3.522 -6.117,3.548 -6.119,3.574 -6.12,3.6 -6.12,4.4 -6.119,4.426 -6.117,4.452 -6.114,4.478 -6.109,4.504 -6.103,4.529 -6.096,4.555 -6.087,4.579 -6.077,4.603 -6.066,4.627 -6.053,4.65 -6.039,4.672 -6.025,4.694 -6.009,4.715 -5.992,4.735 -5.974,4.754 -5.955,4.772 -5.935,4.789 -5.914,4.805 -5.892,4.819 -5.87,4.833 -5.847,4.846 -5.823,4.857 -5.799,4.867 -5.775,4.876 -5.749,4.883 -5.724,4.889 -5.698,4.894 -5.672,4.897 -5.646,4.899 -5.62,4.9
  Top Layer region: 5.646,4.899 5.672,4.897 5.698,4.894 5.724,4.889 5.749,4.883 5.775,4.876 5.799,4.867 5.823,4.857 5.847,4.846 5.87,4.833 5.892,4.819 5.914,4.805 5.935,4.789 5.955,4.772 5.974,4.754 5.992,4.735 6.009,4.715 6.025,4.694 6.039,4.672 6.053,4.65 6.066,4.627 6.077,4.603 6.087,4.579 6.096,4.555 6.103,4.529 6.109,4.504 6.114,4.478 6.117,4.452 6.119,4.426 6.12,4.4 6.12,3.6 6.119,3.574 6.117,3.548 6.114,3.522 6.109,3.496 6.103,3.471 6.096,3.445 6.087,3.421 6.077,3.397 6.066,3.373 6.053,3.35 6.039,3.328 6.025,3.306 6.009,3.285 5.992,3.265 5.974,3.246 5.955,3.228 5.935,3.211 5.914,3.195 5.892,3.181 5.87,3.167 5.847,3.154 5.823,3.143 5.799,3.133 5.775,3.124 5.749,3.117 5.724,3.111 5.698,3.106 5.672,3.103 5.646,3.101 5.62,3.1 5.594,3.101 5.568,3.103 5.542,3.106 5.516,3.111 5.491,3.117 5.465,3.124 5.441,3.133 5.417,3.143 5.393,3.154 5.37,3.167 5.348,3.181 5.326,3.195 5.305,3.211 5.285,3.228 5.266,3.246 5.248,3.265 5.231,3.285 5.215,3.306 5.201,3.328 5.187,3.35 5.174,3.373 5.163,3.397 5.153,3.421 5.144,3.445 5.137,3.471 5.131,3.496 5.126,3.522 5.123,3.548 5.121,3.574 5.12,3.6 5.12,4.4 5.121,4.426 5.123,4.452 5.126,4.478 5.131,4.504 5.137,4.529 5.144,4.555 5.153,4.579 5.163,4.603 5.174,4.627 5.187,4.65 5.201,4.672 5.215,4.694 5.231,4.715 5.248,4.735 5.266,4.754 5.285,4.772 5.305,4.789 5.326,4.805 5.348,4.819 5.37,4.833 5.393,4.846 5.417,4.857 5.441,4.867 5.465,4.876 5.491,4.883 5.516,4.889 5.542,4.894 5.568,4.897 5.594,4.899 5.62,4.9
  Top Layer region: -5.594,1.099 -5.568,1.097 -5.542,1.094 -5.516,1.089 -5.491,1.083 -5.465,1.076 -5.441,1.067 -5.417,1.057 -5.393,1.046 -5.37,1.033 -5.348,1.019 -5.326,1.005 -5.305,0.989 -5.285,0.972 -5.266,0.954 -5.248,0.935 -5.231,0.915 -5.215,0.894 -5.201,0.872 -5.187,0.85 -5.174,0.827 -5.163,0.803 -5.153,0.779 -5.144,0.755 -5.137,0.729 -5.131,0.704 -5.126,0.678 -5.123,0.652 -5.121,0.626 -5.12,0.6 -5.12,-0.6 -5.121,-0.626 -5.123,-0.652 -5.126,-0.678 -5.131,-0.704 -5.137,-0.729 -5.144,-0.755 -5.153,-0.779 -5.163,-0.803 -5.174,-0.827 -5.187,-0.85 -5.201,-0.872 -5.215,-0.894 -5.231,-0.915 -5.248,-0.935 -5.266,-0.954 -5.285,-0.972 -5.305,-0.989 -5.326,-1.005 -5.348,-1.019 -5.37,-1.033 -5.393,-1.046 -5.417,-1.057 -5.441,-1.067 -5.465,-1.076 -5.491,-1.083 -5.516,-1.089 -5.542,-1.094 -5.568,-1.097 -5.594,-1.099 -5.62,-1.1 -5.646,-1.099 -5.672,-1.097 -5.698,-1.094 -5.724,-1.089 -5.749,-1.083 -5.775,-1.076 -5.799,-1.067 -5.823,-1.057 -5.847,-1.046 -5.87,-1.033 -5.892,-1.019 -5.914,-1.005 -5.935,-0.989 -5.955,-0.972 -5.974,-0.954 -5.992,-0.935 -6.009,-0.915 -6.025,-0.894 -6.039,-0.872 -6.053,-0.85 -6.066,-0.827 -6.077,-0.803 -6.087,-0.779 -6.096,-0.755 -6.103,-0.729 -6.109,-0.704 -6.114,-0.678 -6.117,-0.652 -6.119,-0.626 -6.12,-0.6 -6.12,0.6 -6.119,0.626 -6.117,0.652 -6.114,0.678 -6.109,0.704 -6.103,0.729 -6.096,0.755 -6.087,0.779 -6.077,0.803 -6.066,0.827 -6.053,0.85 -6.039,0.872 -6.025,0.894 -6.009,0.915 -5.992,0.935 -5.974,0.954 -5.955,0.972 -5.935,0.989 -5.914,1.005 -5.892,1.019 -5.87,1.033 -5.847,1.046 -5.823,1.057 -5.799,1.067 -5.775,1.076 -5.749,1.083 -5.724,1.089 -5.698,1.094 -5.672,1.097 -5.646,1.099 -5.62,1.1
  Top Layer region: 5.646,1.099 5.672,1.097 5.698,1.094 5.724,1.089 5.749,1.083 5.775,1.076 5.799,1.067 5.823,1.057 5.847,1.046 5.87,1.033 5.892,1.019 5.914,1.005 5.935,0.989 5.955,0.972 5.974,0.954 5.992,0.935 6.009,0.915 6.025,0.894 6.039,0.872 6.053,0.85 6.066,0.827 6.077,0.803 6.087,0.779 6.096,0.755 6.103,0.729 6.109,0.704 6.114,0.678 6.117,0.652 6.119,0.626 6.12,0.6 6.12,-0.6 6.119,-0.626 6.117,-0.652 6.114,-0.678 6.109,-0.704 6.103,-0.729 6.096,-0.755 6.087,-0.779 6.077,-0.803 6.066,-0.827 6.053,-0.85 6.039,-0.872 6.025,-0.894 6.009,-0.915 5.992,-0.935 5.974,-0.954 5.955,-0.972 5.935,-0.989 5.914,-1.005 5.892,-1.019 5.87,-1.033 5.847,-1.046 5.823,-1.057 5.799,-1.067 5.775,-1.076 5.749,-1.083 5.724,-1.089 5.698,-1.094 5.672,-1.097 5.646,-1.099 5.62,-1.1 5.594,-1.099 5.568,-1.097 5.542,-1.094 5.516,-1.089 5.491,-1.083 5.465,-1.076 5.441,-1.067 5.417,-1.057 5.393,-1.046 5.37,-1.033 5.348,-1.019 5.326,-1.005 5.305,-0.989 5.285,-0.972 5.266,-0.954 5.248,-0.935 5.231,-0.915 5.215,-0.894 5.201,-0.872 5.187,-0.85 5.174,-0.827 5.163,-0.803 5.153,-0.779 5.144,-0.755 5.137,-0.729 5.131,-0.704 5.126,-0.678 5.123,-0.652 5.121,-0.626 5.12,-0.6 5.12,0.6 5.121,0.626 5.123,0.652 5.126,0.678 5.131,0.704 5.137,0.729 5.144,0.755 5.153,0.779 5.163,0.803 5.174,0.827 5.187,0.85 5.201,0.872 5.215,0.894 5.231,0.915 5.248,0.935 5.266,0.954 5.285,0.972 5.305,0.989 5.326,1.005 5.348,1.019 5.37,1.033 5.393,1.046 5.417,1.057 5.441,1.067 5.465,1.076 5.491,1.083 5.516,1.089 5.542,1.094 5.568,1.097 5.594,1.099 5.62,1.1
  Bottom Layer region: -5.594,4.899 -5.568,4.897 -5.542,4.894 -5.516,4.889 -5.491,4.883 -5.465,4.876 -5.441,4.867 -5.417,4.857 -5.393,4.846 -5.37,4.833 -5.348,4.819 -5.326,4.805 -5.305,4.789 -5.285,4.772 -5.266,4.754 -5.248,4.735 -5.231,4.715 -5.215,4.694 -5.201,4.672 -5.187,4.65 -5.174,4.627 -5.163,4.603 -5.153,4.579 -5.144,4.555 -5.137,4.529 -5.131,4.504 -5.126,4.478 -5.123,4.452 -5.121,4.426 -5.12,4.4 -5.12,3.6 -5.121,3.574 -5.123,3.548 -5.126,3.522 -5.131,3.496 -5.137,3.471 -5.144,3.445 -5.153,3.421 -5.163,3.397 -5.174,3.373 -5.187,3.35 -5.201,3.328 -5.215,3.306 -5.231,3.285 -5.248,3.265 -5.266,3.246 -5.285,3.228 -5.305,3.211 -5.326,3.195 -5.348,3.181 -5.37,3.167 -5.393,3.154 -5.417,3.143 -5.441,3.133 -5.465,3.124 -5.491,3.117 -5.516,3.111 -5.542,3.106 -5.568,3.103 -5.594,3.101 -5.62,3.1 -5.646,3.101 -5.672,3.103 -5.698,3.106 -5.724,3.111 -5.749,3.117 -5.775,3.124 -5.799,3.133 -5.823,3.143 -5.847,3.154 -5.87,3.167 -5.892,3.181 -5.914,3.195 -5.935,3.211 -5.955,3.228 -5.974,3.246 -5.992,3.265 -6.009,3.285 -6.025,3.306 -6.039,3.328 -6.053,3.35 -6.066,3.373 -6.077,3.397 -6.087,3.421 -6.096,3.445 -6.103,3.471 -6.109,3.496 -6.114,3.522 -6.117,3.548 -6.119,3.574 -6.12,3.6 -6.12,4.4 -6.119,4.426 -6.117,4.452 -6.114,4.478 -6.109,4.504 -6.103,4.529 -6.096,4.555 -6.087,4.579 -6.077,4.603 -6.066,4.627 -6.053,4.65 -6.039,4.672 -6.025,4.694 -6.009,4.715 -5.992,4.735 -5.974,4.754 -5.955,4.772 -5.935,4.789 -5.914,4.805 -5.892,4.819 -5.87,4.833 -5.847,4.846 -5.823,4.857 -5.799,4.867 -5.775,4.876 -5.749,4.883 -5.724,4.889 -5.698,4.894 -5.672,4.897 -5.646,4.899 -5.62,4.9
  Bottom Layer region: 5.646,4.899 5.672,4.897 5.698,4.894 5.724,4.889 5.749,4.883 5.775,4.876 5.799,4.867 5.823,4.857 5.847,4.846 5.87,4.833 5.892,4.819 5.914,4.805 5.935,4.789 5.955,4.772 5.974,4.754 5.992,4.735 6.009,4.715 6.025,4.694 6.039,4.672 6.053,4.65 6.066,4.627 6.077,4.603 6.087,4.579 6.096,4.555 6.103,4.529 6.109,4.504 6.114,4.478 6.117,4.452 6.119,4.426 6.12,4.4 6.12,3.6 6.119,3.574 6.117,3.548 6.114,3.522 6.109,3.496 6.103,3.471 6.096,3.445 6.087,3.421 6.077,3.397 6.066,3.373 6.053,3.35 6.039,3.328 6.025,3.306 6.009,3.285 5.992,3.265 5.974,3.246 5.955,3.228 5.935,3.211 5.914,3.195 5.892,3.181 5.87,3.167 5.847,3.154 5.823,3.143 5.799,3.133 5.775,3.124 5.749,3.117 5.724,3.111 5.698,3.106 5.672,3.103 5.646,3.101 5.62,3.1 5.594,3.101 5.568,3.103 5.542,3.106 5.516,3.111 5.491,3.117 5.465,3.124 5.441,3.133 5.417,3.143 5.393,3.154 5.37,3.167 5.348,3.181 5.326,3.195 5.305,3.211 5.285,3.228 5.266,3.246 5.248,3.265 5.231,3.285 5.215,3.306 5.201,3.328 5.187,3.35 5.174,3.373 5.163,3.397 5.153,3.421 5.144,3.445 5.137,3.471 5.131,3.496 5.126,3.522 5.123,3.548 5.121,3.574 5.12,3.6 5.12,4.4 5.121,4.426 5.123,4.452 5.126,4.478 5.131,4.504 5.137,4.529 5.144,4.555 5.153,4.579 5.163,4.603 5.174,4.627 5.187,4.65 5.201,4.672 5.215,4.694 5.231,4.715 5.248,4.735 5.266,4.754 5.285,4.772 5.305,4.789 5.326,4.805 5.348,4.819 5.37,4.833 5.393,4.846 5.417,4.857 5.441,4.867 5.465,4.876 5.491,4.883 5.516,4.889 5.542,4.894 5.568,4.897 5.594,4.899 5.62,4.9
  Bottom Layer region: 5.646,1.099 5.672,1.097 5.698,1.094 5.724,1.089 5.749,1.083 5.775,1.076 5.799,1.067 5.823,1.057 5.847,1.046 5.87,1.033 5.892,1.019 5.914,1.005 5.935,0.989 5.955,0.972 5.974,0.954 5.992,0.935 6.009,0.915 6.025,0.894 6.039,0.872 6.053,0.85 6.066,0.827 6.077,0.803 6.087,0.779 6.096,0.755 6.103,0.729 6.109,0.704 6.114,0.678 6.117,0.652 6.119,0.626 6.12,0.6 6.12,-0.6 6.119,-0.626 6.117,-0.652 6.114,-0.678 6.109,-0.704 6.103,-0.729 6.096,-0.755 6.087,-0.779 6.077,-0.803 6.066,-0.827 6.053,-0.85 6.039,-0.872 6.025,-0.894 6.009,-0.915 5.992,-0.935 5.974,-0.954 5.955,-0.972 5.935,-0.989 5.914,-1.005 5.892,-1.019 5.87,-1.033 5.847,-1.046 5.823,-1.057 5.799,-1.067 5.775,-1.076 5.749,-1.083 5.724,-1.089 5.698,-1.094 5.672,-1.097 5.646,-1.099 5.62,-1.1 5.594,-1.099 5.568,-1.097 5.542,-1.094 5.516,-1.089 5.491,-1.083 5.465,-1.076 5.441,-1.067 5.417,-1.057 5.393,-1.046 5.37,-1.033 5.348,-1.019 5.326,-1.005 5.305,-0.989 5.285,-0.972 5.266,-0.954 5.248,-0.935 5.231,-0.915 5.215,-0.894 5.201,-0.872 5.187,-0.85 5.174,-0.827 5.163,-0.803 5.153,-0.779 5.144,-0.755 5.137,-0.729 5.131,-0.704 5.126,-0.678 5.123,-0.652 5.121,-0.626 5.12,-0.6 5.12,0.6 5.121,0.626 5.123,0.652 5.126,0.678 5.131,0.704 5.137,0.729 5.144,0.755 5.153,0.779 5.163,0.803 5.174,0.827 5.187,0.85 5.201,0.872 5.215,0.894 5.231,0.915 5.248,0.935 5.266,0.954 5.285,0.972 5.305,0.989 5.326,1.005 5.348,1.019 5.37,1.033 5.393,1.046 5.417,1.057 5.441,1.067 5.465,1.076 5.491,1.083 5.516,1.089 5.542,1.094 5.568,1.097 5.594,1.099 5.62,1.1
  Bottom Layer region: -5.594,1.099 -5.568,1.097 -5.542,1.094 -5.516,1.089 -5.491,1.083 -5.465,1.076 -5.441,1.067 -5.417,1.057 -5.393,1.046 -5.37,1.033 -5.348,1.019 -5.326,1.005 -5.305,0.989 -5.285,0.972 -5.266,0.954 -5.248,0.935 -5.231,0.915 -5.215,0.894 -5.201,0.872 -5.187,0.85 -5.174,0.827 -5.163,0.803 -5.153,0.779 -5.144,0.755 -5.137,0.729 -5.131,0.704 -5.126,0.678 -5.123,0.652 -5.121,0.626 -5.12,0.6 -5.12,-0.6 -5.121,-0.626 -5.123,-0.652 -5.126,-0.678 -5.131,-0.704 -5.137,-0.729 -5.144,-0.755 -5.153,-0.779 -5.163,-0.803 -5.174,-0.827 -5.187,-0.85 -5.201,-0.872 -5.215,-0.894 -5.231,-0.915 -5.248,-0.935 -5.266,-0.954 -5.285,-0.972 -5.305,-0.989 -5.326,-1.005 -5.348,-1.019 -5.37,-1.033 -5.393,-1.046 -5.417,-1.057 -5.441,-1.067 -5.465,-1.076 -5.491,-1.083 -5.516,-1.089 -5.542,-1.094 -5.568,-1.097 -5.594,-1.099 -5.62,-1.1 -5.646,-1.099 -5.672,-1.097 -5.698,-1.094 -5.724,-1.089 -5.749,-1.083 -5.775,-1.076 -5.799,-1.067 -5.823,-1.057 -5.847,-1.046 -5.87,-1.033 -5.892,-1.019 -5.914,-1.005 -5.935,-0.989 -5.955,-0.972 -5.974,-0.954 -5.992,-0.935 -6.009,-0.915 -6.025,-0.894 -6.039,-0.872 -6.053,-0.85 -6.066,-0.827 -6.077,-0.803 -6.087,-0.779 -6.096,-0.755 -6.103,-0.729 -6.109,-0.704 -6.114,-0.678 -6.117,-0.652 -6.119,-0.626 -6.12,-0.6 -6.12,0.6 -6.119,0.626 -6.117,0.652 -6.114,0.678 -6.109,0.704 -6.103,0.729 -6.096,0.755 -6.087,0.779 -6.077,0.803 -6.066,0.827 -6.053,0.85 -6.039,0.872 -6.025,0.894 -6.009,0.915 -5.992,0.935 -5.974,0.954 -5.955,0.972 -5.935,0.989 -5.914,1.005 -5.892,1.019 -5.87,1.033 -5.847,1.046 -5.823,1.057 -5.799,1.067 -5.775,1.076 -5.749,1.083 -5.724,1.089 -5.698,1.094 -5.672,1.097 -5.646,1.099 -5.62,1.1
  silkscreen extent -4.47,-1.6 4.47,6.45, body extent -5.77,-2.1 5.77,5.1, height 1.06
HUQFN20_SOT1628-1_NXP-M [mil]
  rect 36x8 smd paste+0 mask+0: 1(-57,31.5) 2(-57,15.75) 3(-57,0) 4(-57,-15.75) 5(-57,-31.5) 11(57,-31.5) 12(57,-15.75) 13(57,0) 14(57,15.75) 15(57,31.5)
  rect 8x36 smd paste+0 mask+0: 6(-31.5,-57) 7(-15.75,-57) 8(0,-57) 9(15.75,-57) 10(31.5,-57) 16(31.5,57) 17(15.75,57) 18(0,57) 19(-15.75,57) 20(-31.5,57)
  rect 67x67 smd paste+0 mask+0: 21(0,0)
  silkscreen extent -64,-95 64,95, body extent -59,-59 59,59, height 24
IC_TI60F100S3F2C3 [mm]
  round 0.2 smd mask+0.075: A1(-2.25,2.25) A2(-1.75,2.25) A3(-1.25,2.25) A4(-0.75,2.25) A5(-0.25,2.25) A6(0.25,2.25) A7(0.75,2.25) A8(1.25,2.25) A9(1.75,2.25) A10(2.25,2.25) B1(-2.25,1.75) B2(-1.75,1.75) B3(-1.25,1.75) B4(-0.75,1.75) B5(-0.25,1.75) B6(0.25,1.75) B7(0.75,1.75) B8(1.25,1.75) B9(1.75,1.75) B10(2.25,1.75) C1(-2.25,1.25) C2(-1.75,1.25) C3(-1.25,1.25) C4(-0.75,1.25) C5(-0.25,1.25) C6(0.25,1.25) C7(0.75,1.25) C8(1.25,1.25) C9(1.75,1.25) C10(2.25,1.25) D1(-2.25,0.75) D2(-1.75,0.75) D3(-1.25,0.75) D4(-0.75,0.75) D5(-0.25,0.75) D6(0.25,0.75) D7(0.75,0.75) D8(1.25,0.75) D9(1.75,0.75) D10(2.25,0.75) E1(-2.25,0.25) E2(-1.75,0.25) E3(-1.25,0.25) E4(-0.75,0.25) E5(-0.25,0.25) E6(0.25,0.25) E7(0.75,0.25) E8(1.25,0.25) E9(1.75,0.25) E10(2.25,0.25) F1(-2.25,-0.25) F2(-1.75,-0.25) F3(-1.25,-0.25) F4(-0.75,-0.25) F5(-0.25,-0.25) F6(0.25,-0.25) F7(0.75,-0.25) F8(1.25,-0.25) F9(1.75,-0.25) F10(2.25,-0.25) G1(-2.25,-0.75) G2(-1.75,-0.75) G3(-1.25,-0.75) G4(-0.75,-0.75) G5(-0.25,-0.75) G6(0.25,-0.75) G7(0.75,-0.75) G8(1.25,-0.75) G9(1.75,-0.75) G10(2.25,-0.75) H1(-2.25,-1.25) H2(-1.75,-1.25) H3(-1.25,-1.25) H4(-0.75,-1.25) H5(-0.25,-1.25) H6(0.25,-1.25) H7(0.75,-1.25) H8(1.25,-1.25) H9(1.75,-1.25) H10(2.25,-1.25) J1(-2.25,-1.75) J2(-1.75,-1.75) J3(-1.25,-1.75) J4(-0.75,-1.75) J5(-0.25,-1.75) J6(0.25,-1.75) J7(0.75,-1.75) J8(1.25,-1.75) J9(1.75,-1.75) J10(2.25,-1.75) K1(-2.25,-2.25) K2(-1.75,-2.25) K3(-1.25,-2.25) K4(-0.75,-2.25) K5(-0.25,-2.25) K6(0.25,-2.25) K7(0.75,-2.25) K8(1.25,-2.25) K9(1.75,-2.25) K10(2.25,-2.25)
  silkscreen extent -3.35,-2.75 2.75,2.75, body extent -2.75,-2.75 2.75,2.75, height 1.1
INDC1005X55N [mm]
  rect 0.54x0.6 smd: 1(-0.432,0) 2(0.432,0)
  silkscreen extent 1.1,-0.1 1.3,0.1, body extent -0.5,-0.25 0.5,0.3, height 0.5
INDC1608X95N [mm]
  rect 0.9x0.97 smd: 1(-0.785,0) 2(0.785,0)
  body extent -0.5,-0.25 0.5,0.25, height 0.55
JST_S2B-PH-SM4-TB [mm]
  rect 1x3.5 smd: 1(1,0) 2(-1,0)
  rect 1.5x3.4 smd: P1(3.35,5.75) P2(-3.35,5.75)
  silkscreen extent 1.77,-1.73 2.03,-1.47, body extent -3.95,-1.23 3.95,7.37, height 5.5
LED-0603-RED [mm]
  round 0.254 on Mech14: 0(0,0)
  rrect25% 0.8x0.8 smd: 1(-0.85,0) 2(0.85,0)
  Top Layer pour cut-out: -0.5,0.5 0.5,0.5 0.5,-0.5 -0.5,-0.5
  silkscreen extent -1.55,-0.67 1.68,0.67, body extent -0.8,-0.4 0.8,0.4, height 0.75
LQM18P_603_INDUCTOR_SMD [mm] "LQM18P CHIP COIL INDUCTOR for Consumer equipment & Industrial equipment - 0603 Package size"
  rect 0.7x0.85 smd paste+0 mask+0.05: 1(-0.675,0) 2(0.675,0)
  body extent -0.8,-0.4 0.8,0.4, height 0.95
LQW_201_smd [mm] "Chip SMD component 201; Body 0.6 x 0.3 mm (LxW typ); small footprint"
  rect 0.25x0.35 smd paste+0 mask+0.025: 1(-0.25,0) 2(0.25,0)
  body extent -0.26,-0.2 0.27,0.2, height 0.45
lqw_402_smd [mm] "Chip SMD component 402; Body 1.0 x 0.5 mm (LxW typ);small footprint"
  rect 0.5x0.55 smd mask+0.025: 1(-0.4,0) 2(0.4,0)
  body extent -0.5,-0.3 0.5,0.3, height 0.6
LXRW0_MUR-M [mil]
  rect 11x9 smd paste+0 mask+0: 1(-7.5,7.87) 2(-7.5,-7.87) 3(7.5,-7.87) 4(7.5,7.87)
  silkscreen extent -35,4 -27,12, body extent -13,-13 13,13, height 12
M24C04-DRMN3TP_K-Footprint-1 [mm]
  rect 1.525x0.65 smd: 1(-2.712,1.905) 2(-2.712,0.635) 3(-2.712,-0.635) 4(-2.712,-1.905) 5(2.712,-1.905) 6(2.712,-0.635) 7(2.712,0.635) 8(2.712,1.905)
  silkscreen extent -3.47,-2.45 1.6,2.58, body extent -3,-2.45 3,2.45, height 1.75
microSD [mm]
  rect 0.8x1.5 smd: 1(0,0) 2(1.1,-0.4) 3(2.2,0) 4(3.3,0.2) 5(4.4,0) 6(5.5,0.2) 7(6.6,0) 8(7.7,0)
  rect 1.4x1.9 smd: 9(-4.675,3.95) 10(8.5,2.95)
  rect 1.3x1.4 smd: 11(1.2,-10.275) 12(6.875,-10.3)
  body extent -5.05,-10.68 8.95,4.53, height 1.83
qfn32l_5x5mm [mm] "32 Leads, Body 5.0x5.0mm, Pitch 0.50mm, QFN32L"
  rrect5% 3.7x3.7 smd paste-3.2 mask+0.03: 0(0,0)
  rrect50% 0.7x0.3 smd mask+0.03: 1(-2.4,1.75) 2(-2.4,1.25) 3(-2.4,0.75) 4(-2.4,0.25) 5(-2.4,-0.25) 6(-2.4,-0.75) 7(-2.4,-1.25) 8(-2.4,-1.75) 17(2.4,-1.75) 18(2.4,-1.25) 19(2.4,-0.75) 20(2.4,-0.25) 21(2.4,0.25) 22(2.4,0.75) 23(2.4,1.25) 24(2.4,1.75)
  rrect50% 0.3x0.7 smd mask+0.03: 9(-1.75,-2.4) 10(-1.25,-2.4) 11(-0.75,-2.4) 12(-0.25,-2.4) 13(0.25,-2.4) 14(0.75,-2.4) 15(1.25,-2.4) 16(1.75,-2.4) 25(1.75,2.4) 26(1.25,2.4) 27(0.75,2.4) 28(0.25,2.4) 29(-0.25,2.4) 30(-0.75,2.4) 31(-1.25,2.4) 32(-1.75,2.4)
  Mechanical 15 keep-out lines w0.1: -2.85,-2.85 2.85,-2.85 2.85,2.85 -2.85,2.85 -2.85,-2.85
  silkscreen extent -2.82,-2.65 2.65,2.82, body extent -2.5,-2.5 2.5,2.5, height 1
QFN35P1000X1000X85_HS-105M [mm] "QFN, 104-Leads, Body 10.00x10.00mm, Pitch 0.35mm, Thermal Pad 7.55x7.55mm, IPC Low Density"
  oval 0.9x0.2 smd: 1(-4.975,4.375) 26(-4.975,-4.375) 53(4.975,-4.375) 78(4.975,4.375)
  oval 1x0.2 smd: 2(-4.925,4.025) 3(-4.925,3.675) 4(-4.925,3.325) 5(-4.925,2.975) 6(-4.925,2.625) 7(-4.925,2.275) 8(-4.925,1.925) 9(-4.925,1.575) 10(-4.925,1.225) 11(-4.925,0.875) 12(-4.925,0.525) 13(-4.925,0.175) 14(-4.925,-0.175) 15(-4.925,-0.525) 16(-4.925,-0.875) 17(-4.925,-1.225) 18(-4.925,-1.575) 19(-4.925,-1.925) 20(-4.925,-2.275) 21(-4.925,-2.625) 22(-4.925,-2.975) 23(-4.925,-3.325) 24(-4.925,-3.675) 25(-4.925,-4.025) 54(4.925,-4.025) 55(4.925,-3.675) 56(4.925,-3.325) 57(4.925,-2.975) 58(4.925,-2.625) 59(4.925,-2.275) 60(4.925,-1.925) 61(4.925,-1.575) 62(4.925,-1.225) 63(4.925,-0.875) 64(4.925,-0.525) 65(4.925,-0.175) 66(4.925,0.175) 67(4.925,0.525) 68(4.925,0.875) 69(4.925,1.225) 70(4.925,1.575) 71(4.925,1.925) 72(4.925,2.275) 73(4.925,2.625) 74(4.925,2.975) 75(4.925,3.325) 76(4.925,3.675) 77(4.925,4.025)
  oval 0.2x0.9 smd: 27(-4.375,-4.975) 52(4.375,-4.975) 79(4.375,4.975) 104(-4.375,4.975)
  oval 0.2x1 smd: 28(-4.025,-4.925) 29(-3.675,-4.925) 30(-3.325,-4.925) 31(-2.975,-4.925) 32(-2.625,-4.925) 33(-2.275,-4.925) 34(-1.925,-4.925) 35(-1.575,-4.925) 36(-1.225,-4.925) 37(-0.875,-4.925) 38(-0.525,-4.925) 39(-0.175,-4.925) 40(0.175,-4.925) 41(0.525,-4.925) 42(0.875,-4.925) 43(1.225,-4.925) 44(1.575,-4.925) 45(1.925,-4.925) 46(2.275,-4.925) 47(2.625,-4.925) 48(2.975,-4.925) 49(3.325,-4.925) 50(3.675,-4.925) 51(4.025,-4.925) 80(4.025,4.925) 81(3.675,4.925) 82(3.325,4.925) 83(2.975,4.925) 84(2.625,4.925) 85(2.275,4.925) 86(1.925,4.925) 87(1.575,4.925) 88(1.225,4.925) 89(0.875,4.925) 90(0.525,4.925) 91(0.175,4.925) 92(-0.175,4.925) 93(-0.525,4.925) 94(-0.875,4.925) 95(-1.225,4.925) 96(-1.575,4.925) 97(-1.925,4.925) 98(-2.275,4.925) 99(-2.625,4.925) 100(-2.975,4.925) 101(-3.325,4.925) 102(-3.675,4.925) 103(-4.025,4.925)
  rect 7.55x7.55 smd: 105(0,0)
  silkscreen extent -5.92,-5.15 5.15,5.15, body extent -5,-5 5,5, height 0.85
QFN40P140X180X60-10N [mm]
  rrect40% 0.82x0.22 smd mask+0: 1(-0.53,0.2)
  rrect40% 0.74x0.22 smd mask+0: 2(-0.58,-0.2) 6(0.58,-0.2) 7(0.58,0.2)
  rrect40% 0.22x0.74 smd mask+0: 3(-0.4,-0.78) 4(0,-0.78) 5(0.4,-0.78) 8(0.4,0.78) 9(0,0.78) 10(-0.4,0.78)
  silkscreen extent -1.37,0.13 -1.23,0.27
QFN50P400X400X80-25N [mm]
  rrect25% 0.84x0.26 smd: 1(-1.935,1.25) 2(-1.935,0.75) 3(-1.935,0.25) 4(-1.935,-0.25) 5(-1.935,-0.75) 6(-1.935,-1.25) 13(1.935,-1.25) 14(1.935,-0.75) 15(1.935,-0.25) 16(1.935,0.25) 17(1.935,0.75) 18(1.935,1.25)
  rrect25% 0.26x0.84 smd: 7(-1.25,-1.935) 8(-0.75,-1.935) 9(-0.25,-1.935) 10(0.25,-1.935) 11(0.75,-1.935) 12(1.25,-1.935) 19(1.25,1.935) 20(0.75,1.935) 21(0.25,1.935) 22(-0.25,1.935) 23(-0.75,1.935) 24(-1.25,1.935)
  rect 2.45x2.45 smd paste-2: 25(0,0)
  silkscreen extent -3.07,-2 2,2, body extent -2,-2 2,2, height 0.8
QFN-24_UF_LIT-M [mm]
  rect 0.9x0.25 smd paste+0 mask+0: 1(-2,1.25) 2(-2,0.75) 3(-2,0.25) 4(-2,-0.25) 5(-2,-0.75) 6(-2,-1.25) 13(2,-1.25) 14(2,-0.75) 15(2,-0.25) 16(2,0.25) 17(2,0.75) 18(2,1.25)
  rect 0.25x0.9 smd paste+0 mask+0: 7(-1.25,-2) 8(-0.75,-2) 9(-0.25,-2) 10(0.25,-2) 11(0.75,-2) 12(1.25,-2) 19(1.25,2) 20(0.75,2) 21(0.25,2) 22(-0.25,2) 23(-0.75,2) 24(-1.25,2)
  rect 2.55x2.55 smd paste-1.275 mask+0: 25(0,0)
  silkscreen extent -2.18,-2.96 2.18,2.96, body extent -2.05,-2.05 2.05,2.05, height 0.8
RESC1005X40X25ML05T05 [mm] "Chip Resistor, 2-Leads, Body 1.00x0.50mm, IPC Low Density"
  rect 0.65x0.65 smd: 1(-0.5,0) 2(0.5,0)
  body extent -0.53,-0.27 0.53,0.28, height 0.4
RSB0040B-MFG [mm]
  rrect50% 0.6x0.2 smd paste+0 mask+0: 1(-2.4,1.8) 2(-2.4,1.4) 3(-2.4,1) 4(-2.4,0.6) 5(-2.4,0.2) 6(-2.4,-0.2) 7(-2.4,-0.6) 8(-2.4,-1) 9(-2.4,-1.4) 10(-2.4,-1.8) 21(2.4,-1.8) 22(2.4,-1.4) 23(2.4,-1) 24(2.4,-0.6) 25(2.4,-0.2) 26(2.4,0.2) 27(2.4,0.6) 28(2.4,1) 29(2.4,1.4) 30(2.4,1.8)
  rrect50% 0.2x0.6 smd paste+0 mask+0: 11(-1.8,-2.4) 12(-1.4,-2.4) 13(-1,-2.4) 14(-0.6,-2.4) 15(-0.2,-2.4) 16(0.2,-2.4) 17(0.6,-2.4) 18(1,-2.4) 19(1.4,-2.4) 20(1.8,-2.4) 31(1.8,2.4) 32(1.4,2.4) 33(1,2.4) 34(0.6,2.4) 35(0.2,2.4) 36(-0.2,2.4) 37(-0.6,2.4) 38(-1,2.4) 39(-1.4,2.4) 40(-1.8,2.4)
  rrect3% 3.5x3.5 smd paste-1000 mask+0: 41(0,0)
  silkscreen extent -3.37,-2.58 2.58,2.58, body extent -2.8,-2.8 2.8,2.8, height 0.25
RTR040N03HZGTL-Footprint-1 [mm]
  rect 0.7x1.3 smd: 1(-0.95,-1.6) 2(0.95,-1.6) 3(0,0.9)
  body extent -1.45,-1.75 1.45,1.05, height 1
SLP0603P2X3F [mm] "Chip Diode; Body  0.6 x 0.3 mm (LxW typ)"
  rect 0.25x0.27 smd mask+0.025: 1(-0.212,0) 2(0.212,0)
  silkscreen extent 0.5,-0.1 0.5,0.1, body extent -0.3,-0.15 0.3,0.15, height 0.32